# Altium PCB PCB1.PcbDoc
Units mm, origin at the board's own origin, x right, y up, seen from the top; angles counter-clockwise.
Board outline 47.4 x 16.7 mm, 2 copper layers (Top Layer, Bottom Layer); 19 components, 10 nets, 49 pads, 6 vias.
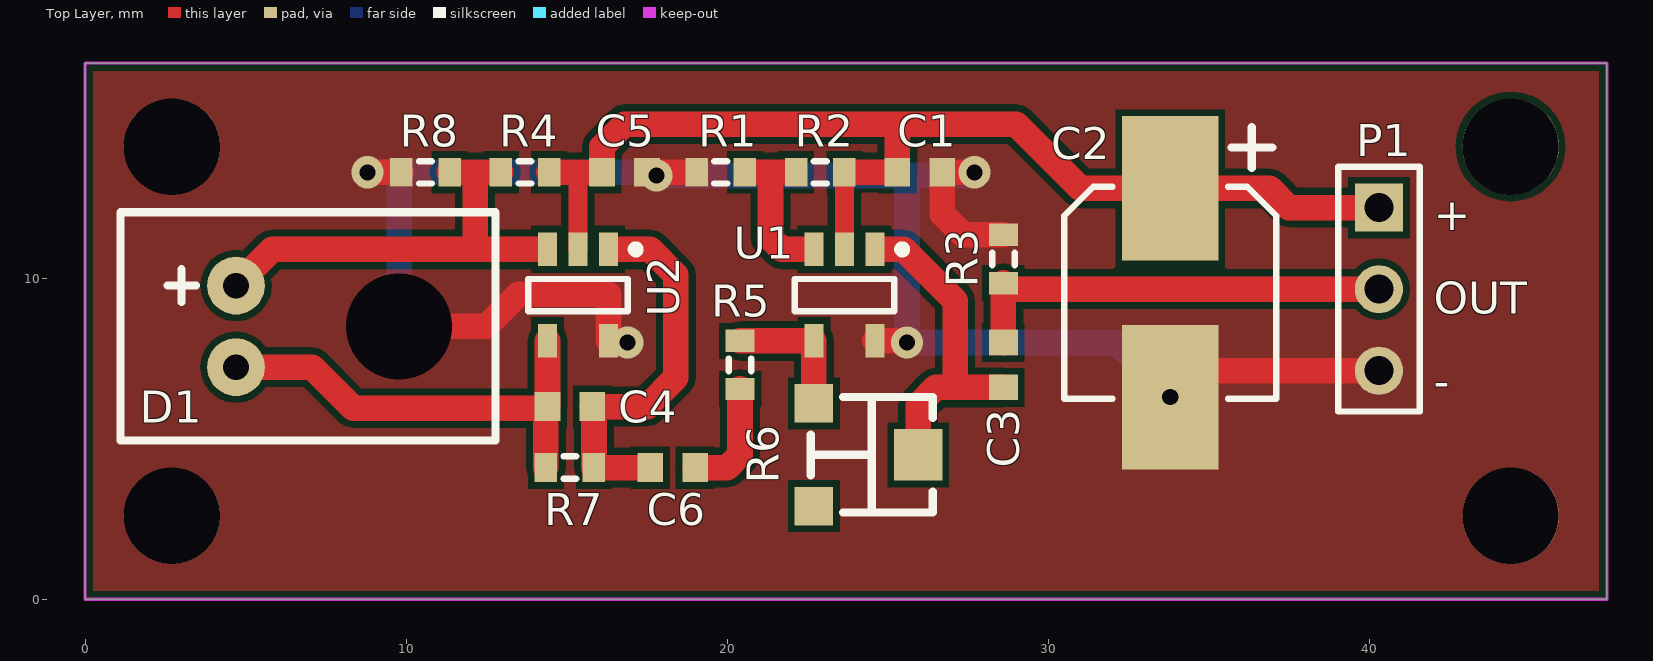
[diagram p0: Top Layer view]
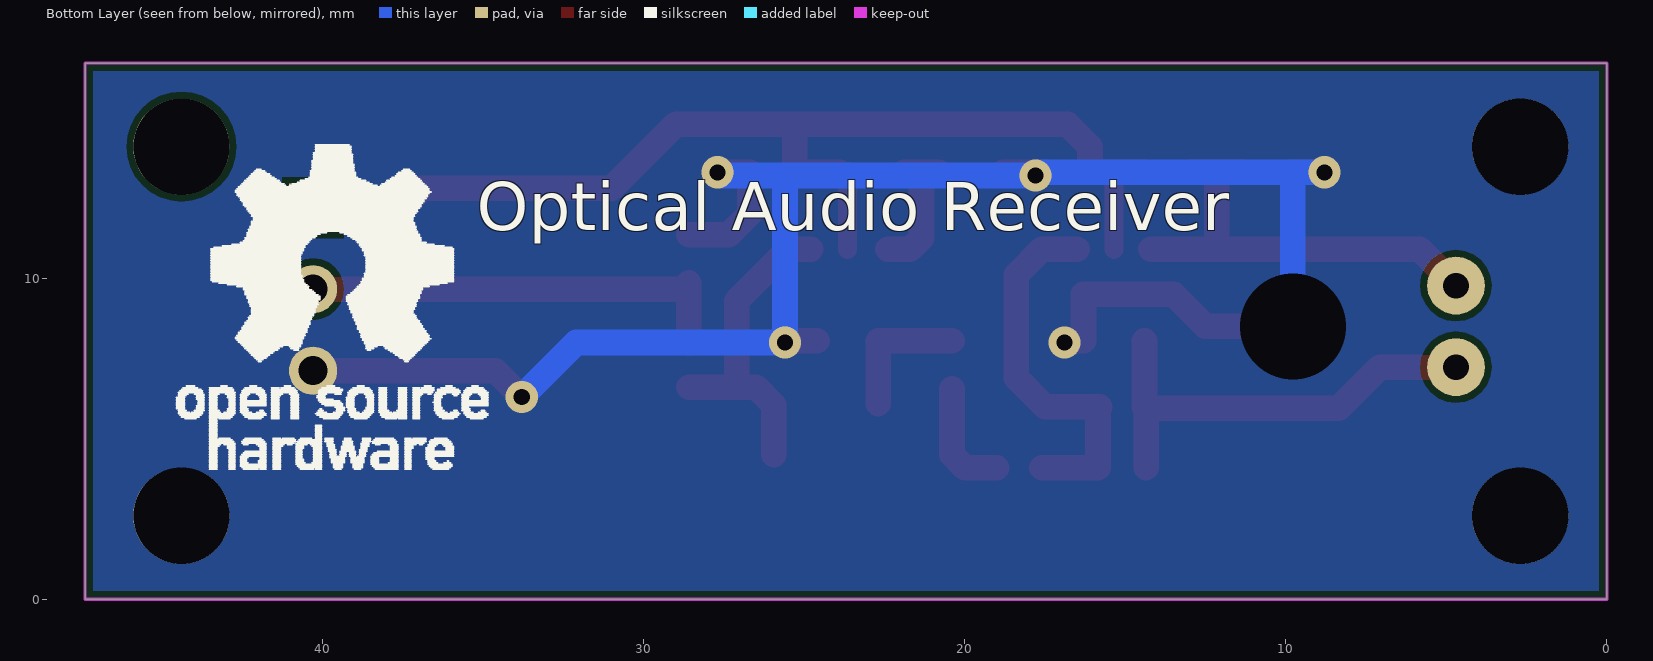
[diagram p1: Bottom Layer view, seen from below]

## Layer stack, top to bottom
Top Solder: solder mask 0.0102, Solder Resist, Dk 3.5
Top Layer: signal copper 0.0356
Dielectric 1: dielectric 0.32, FR-4, Dk 4.8
Bottom Layer: signal copper 0.0356
Bottom Solder: solder mask 0.0102, Solder Resist, Dk 3.5

## Board outline
0,0 0,16.7 47.4,16.7 47.4,0

## Design rules (kind name [scope] priority, off if disabled: settings)
Clearance [All] p1: gap=0.203
DiffPairsRouting [All] p1: maxlimit=10 minlimit=0.203 mostfreqgap=0.8 toplayer_minwidth=0.203 toplayer_maxwidth=10 toplayer_prefwidth=0.8 bottomlayer_minwidth=0.203 bottomlayer_maxwidth=10 bottomlayer_prefwidth=0.8 maxuncoupledlength=12.7
PlaneConnect [All] p1: planeconnectstyle=Direct reliefexpansion=0.508 reliefentries=4 reliefconductorwidth=0.254 reliefairgap=0.254
PolygonConnect [All] p1: connectstyle=Direct reliefconductorwidth=0.254 reliefentries=4 polygonreliefangle="90 Angle" airgapwidth=0.254
RoomDefinition Sheet1 [InComponentClass('Sheet1')] p1 off: confinementstyle=ConfineIn formatcopy=TRUE lockcomponents=FALSE outline 0,0 47.4,0 47.4,16.7 0,16.7
RoutingVias [All] p1: holewidth=0.3 width=0.6 viastyle="Through Hole" minholewidth=0.3 minwidth=0.6 maxholewidth=0.3 maxwidth=0.6
SolderMaskExpansion [All] p1: expansion=0.102
Width [All] p1: maxlimit=10 minlimit=0.203 preferedwidth=0.8
28 further rules are at their usual default settings.

## Classes and differential pairs
component class Sheet1: C1 C2 C3 C4 C5 C6 D1 P1 R1 R2 R3 R4 R5 R6 R7 R8 U1 U2

## Components (designator, comment, footprint, x,y, rotation, side; value= is the part's Value field where it differs from the comment)
C1 "0603" 1608[0603] 26,13.3 r0 top
C2 "EDK106M050A9GAA" EDK106M050A9GAA 33.8,12.8 r270 top
C3 "0603" 1608[0603] 28.6,7.3 r90 top
C4 "0603" 1608[0603] 15.1,6 r0 top
C5 "0603" 1608[0603] 16.8,13.3 r0 top
C6 "0603" 1608[0603] 18.3,4.1 r0 top
D1 "IFD91" IFD91 1.1,8.5 r90 top
P1 "OUTPUT" HDR1X3 40.3,12.2 r270 top
R1 "0603" J1-0603 19.8,13.3 r180 top
R2 "0603" J1-0603 22.9,13.3 r180 top
R3 "0603" J1-0603 28.6,10.6 r90 top
R4 "0603" J1-0603 13.7,13.3 r180 top
R5 "0603" J1-0603 20.4,7.3 r270 top
R6 "TC33X-2-104E" TC33X-2-104E 24.5,4.5 r270 top
R7 "0603" J1-0603 15.1,4.1 r180 top
R8 "0603" J1-0603 10.6,13.3 r0 top
U1 "MCP601R" MCP601_SOT23 24.6,10.9 r270 top
U2 "MCP601R" MCP601_SOT23 16.3,10.9 r270 top
? "Comment" "OpenSourceLOGO small" 39.6,9.2 r180 bottom

## Footprints (in the part's own frame and the unit in brackets; to place one, negate y for a bottom-side part, rotate by r counter-clockwise, add the part's x,y. Pads: shape width x height; smd on the part's side, far side on the other; paste and mask are expansions set on the pad)
1608[0603] [mm] "Chip Capacitor, Body 1.6x0.8mm, IPC High Density"
  rect 0.8x0.9 smd: 1(-0.7,0) 2(0.7,0)
  body extent -0.87,-0.48 0.87,0.48, height 1.3
EDK106M050A9GAA [mm] "Aluminum Electrolytic Capacitor, Body 6,60x6,60x5,40mm, IPC Low Density"
  rect 4.5x3 smd: 1(0,0) 2(6.5,0)
  silkscreen extent -1.91,-3.3 6.55,3.3, body extent -0.05,-3.3 6.55,3.3, height 5.4
HDR1X3 [mm] "Connector; Header; 3 Position"
  rect 1.5x1.5 hole 0.9: 1(0,0)
  round 1.5 hole 0.9: 2(2.54,0) 3(5.08,0)
  silkscreen extent -1.27,-1.27 6.35,1.27
IFD91 [mm]
  round 0 hole 3.3: 0(0,-8.68)
  round 1.8 hole 0.8: 1(-1.27,-3.6) 2(1.27,-3.6)
  silkscreen extent -3.56,-11.68 3.55,0
J1-0603 [mm] "Chip Resistor, Body 1.6x0.8mm, IPC High Density"
  rect 0.7x0.9 smd: 1(-0.75,0) 2(0.75,0)
  silkscreen extent -0.2,-0.35 0.2,0.35, body extent -0.85,-0.48 0.85,0.48, height 0.9
MCP601_SOT23 [mm] "SOT23, 5-Leads, Body 2,90x2,70mm, Pitch 0,95mm, IPC Medium Density"
  rect 1.05x0.6 smd: 1(0,0) 2(0,-0.95) 3(0,-1.9) 4(2.85,-1.9) 5(2.85,0)
  silkscreen extent -0.12,-2.5 1.92,0.98, body extent 0.53,-2.5 2.32,0.6, height 1.45
"OpenSourceLOGO small" [mm]
  silkscreen extent -4.95,-5.15 4.75,4.96
TC33X-2-104E [mm]
  rect 1.2x1.2 smd: 1(-1.6,-1.8) 3(1.6,-1.8)
  rect 1.6x1.5 smd: 2(0,1.45)
  silkscreen extent -1.8,-1.9 1.8,1.9

## Part data
C1 C3 C4 C5 C6: library part Cap, "Capacitor"
C2: library part "Cap Pol1", "Polarized Capacitor (Radial)"
P1: library part "Header 3", "Header, 3-Pin"
R1 R2 R3 R4 R5 R7 R8: library part Res2, "Resistor"
R6: "Potentiometer"

## Free pads (board coordinates)
  round 3 hole 3: 2(2.7,2.6) 2(2.7,14.1) 2(44.4,2.6) 2(44.4,14.1)

## Via types
v1: diameter 1, hole 0.5, Top Layer to Bottom Layer, 6 vias

## Nets (pads, with @x,y where several pads share a name; then routed paths per layer and width w, separated by ;. In a path a pad name is that pad's centre, name@x,y a point inside that pad or via, vN(x,y) a via of type N, cw(c..) or ccw(c..) an arc to the next point about the centre after c; other vN are vias at no path point)
GND: C1.2 C2.2 C5.2 D1.0 P1.3 pad.2@2.7,2.6 pad.2@2.7,14.1 pad.2@44.4,2.6 R1.2 R3.2 R8.1 U1.5 U2.5 | length 61.5
  Top Layer w0.8: v1(8.8,13.3) R8.1 ; D1.0 12.5,8.5 13.5,9.5 16.3,9.5 U2.5 v1@16.85,8.05 ; C5.2 R1.2@18.8,13.3 ; U1.5 25.55,8.05 v1(25.6,8) ; v1(27.7,13.3) C1.2 26.7,12 27.35,11.35 R3.2 ; v1(33.8,6.3) 34.62,7.12 P1.3
  Bottom Layer w0.8: v1(8.8,13.3) 9.8,13.3 ; D1.0 9.78,13.28 9.8,13.3 ; v1(27.7,13.3) 27.6,13.2 25.6,13.2 ; v1(33.8,6.3) 32.1,8 v1(25.6,8) 25.6,13.2 ; 9.8,13.3 17.7,13.3 v1(17.8,13.2) 25.6,13.2
  other v1: 16.9,8
NetC3_1: C3.1 R6.2 U1.1 | length 10.1
  Top Layer w0.8: U1.1@24.8,10.9 25.5,10.9 27.1,9.3 27.1,6.6 ; R6.2 25.95,6.05 26.5,6.6 27.1,6.6 ; C3.1 27.1,6.6
NetC3_2: C3.2 P1.2 R3.1 | length 13.6
  Top Layer w0.8: C3.2 R3.1 28.79,9.66 P1.2
NetC4_1: C4.1 D1.1 R7.2 U2.4 | length 14.2
  Top Layer w0.8: D1.1 7.07,7.23 8.35,5.95 C4.1@14.35,5.95 ; R7.2 C4.1@14.35,5.95 ; U2.4 C4.1 C4.1@14.35,5.95
NetC4_2: C4.2 C6.1 R7.1 U2.1 | length 12.1
  Top Layer w0.8: U2.1@16.5,10.9 17.6,10.9 18.4,10.1 18.4,6.9 17.5,6 C4.2 15.85,5.95 R7.1 C6.1
NetC6_2: C6.2 R5.2 | length 3.6
  Top Layer w0.8: C6.2 20,4.1 20.4,4.5 R5.2
NetD1_2: D1.2 R4.2 R8.2 U2.3 | length 14
  Top Layer w0.8: D1.2 5.83,10.9 12.15,10.9 ; R8.2 12.15,13.3 ; R4.2 12.15,13.3 ; U2.3@14.2,10.9 12.15,10.9 ; 12.15,10.9 12.15,13.3
NetR1_1: R1.1 R2.2 U1.3 | length 4.3
  Top Layer w0.8: R1.1@20.8,13.3 21.35,13.3 ; R2.2@21.9,13.3 21.35,13.3 ; U1.3@22.4,10.9 21.7,10.9 21.35,11.25 21.35,13.3
NetR5_1: R5.1 R6.1 U1.4 | length 4.2
  Top Layer w0.8: R5.1 U1.4 R6.1
VCC: C1.1 C2.1 C5.1 P1.1 R2.1 R4.1 U1.2 U2.2 | length 35.7
  Top Layer w0.254: C1.1@25,13.3 C1.1
  Top Layer w0.6: U2.2 15.35,13.3 ; U1.2 R2.1
  Top Layer w0.8: R4.1 15.35,13.3 C5.1 16.1,14.1 16.8,14.8 25.3,14.8 ; R2.1@23.9,13.3 C1.1@25,13.3 ; C1.1 25.3,14.8 ; P1.1 37.5,12.2 36.9,12.8 C2.1 31,12.8 29,14.8 25.3,14.8
pads on no net: R6.3

## Polygon pours and split planes (outlines as drawn)
GND on Top Layer "topGND" (solid, pour order 0): 0,0 0,16.7 47.4,16.7 47.4,0
GND on Bottom Layer "bottomGND" (solid, pour order 1): 0,0 0,16.7 47.4,16.7 47.4,0

## Keep-outs
Keep-Out Layer:
  the board outline again, w0.1

## Silkscreen, mask and mechanical layers (free items; w line width, h text height)
Top Overlay:
  text "+" at 42,11.5 h1
  text "OUT" at 42,8.9 h1
  text "-" at 42,6.3 h1
Bottom Overlay:
  text "Optical Audio Receiver" at 35.2,11.5 h1.5